# Altium PCB JaidonHillBootcamp.PcbDoc
Units mil, origin at the board's own origin, x right, y up, seen from the top; angles counter-clockwise.
Board outline 1150 x 1400 mil, 2 copper layers (Top Layer, Bottom Layer); 7 components, 4 nets, 15 pads, 3 vias.
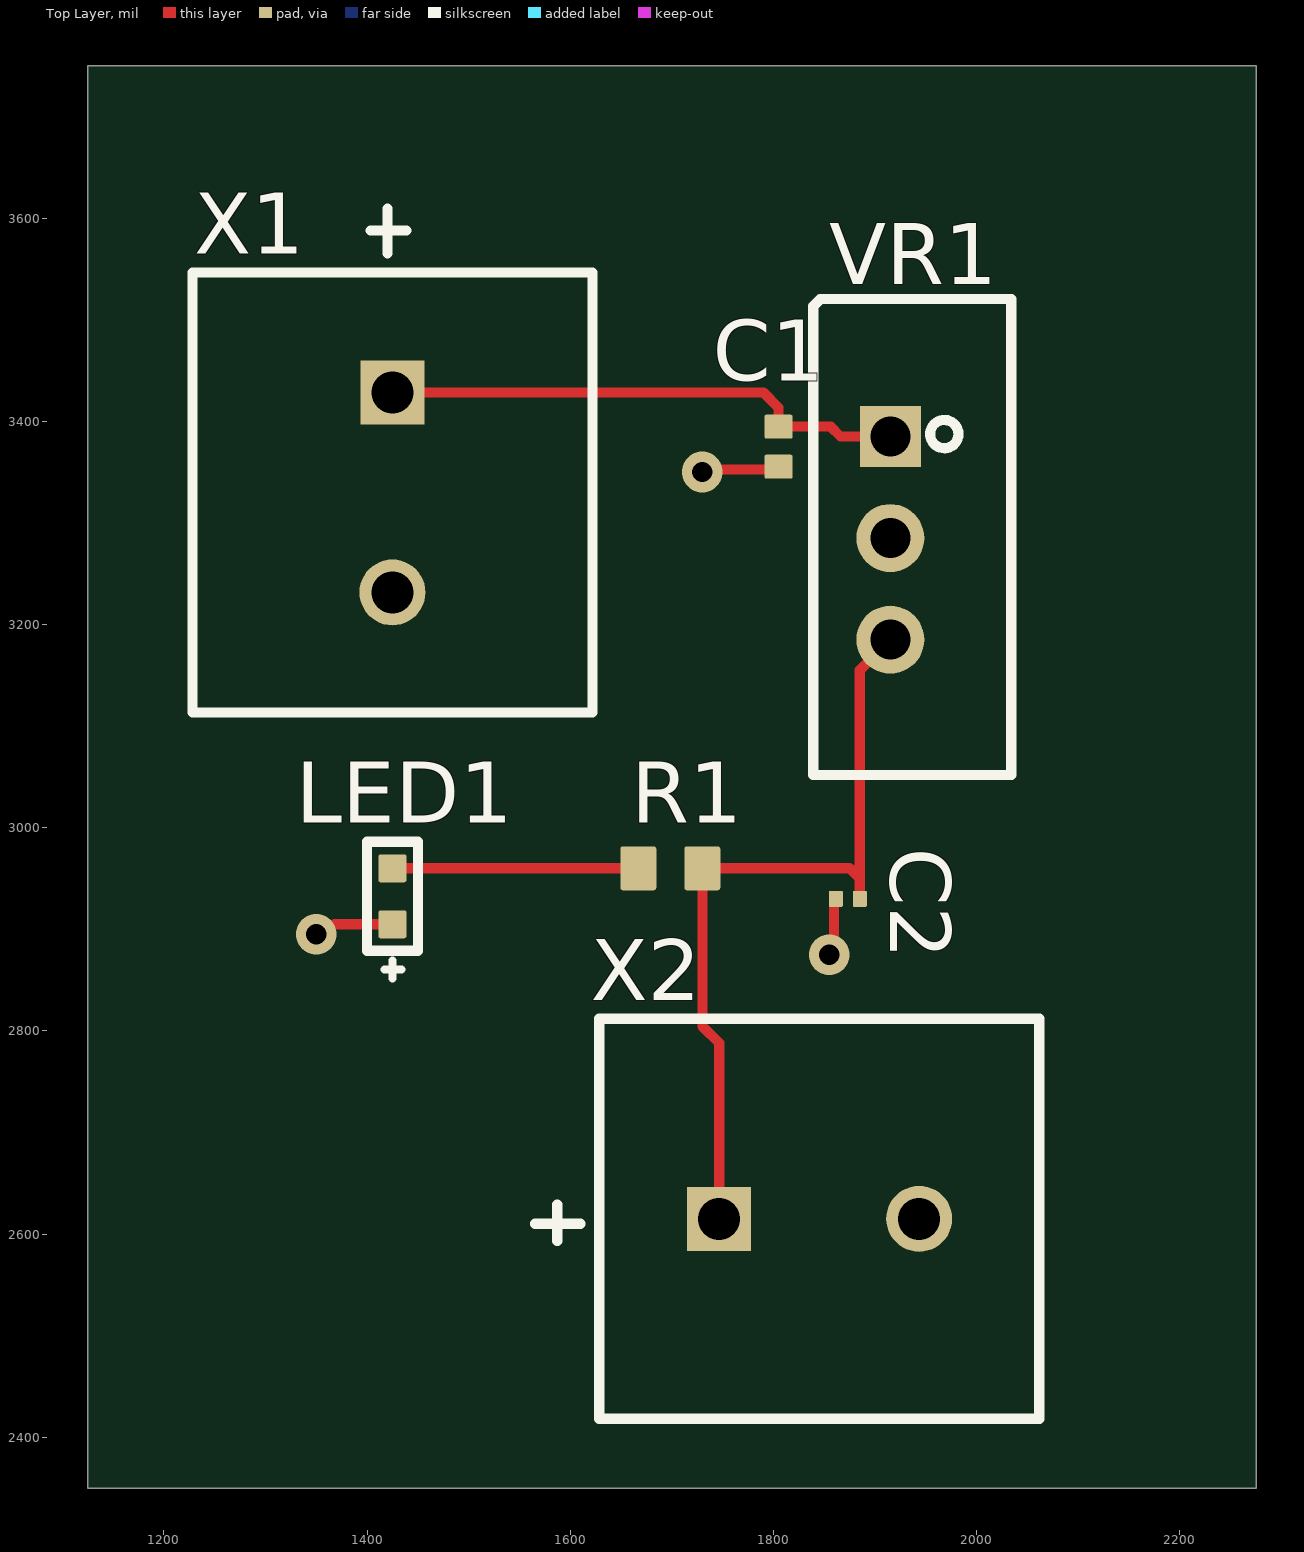
[diagram p0: Top Layer view]
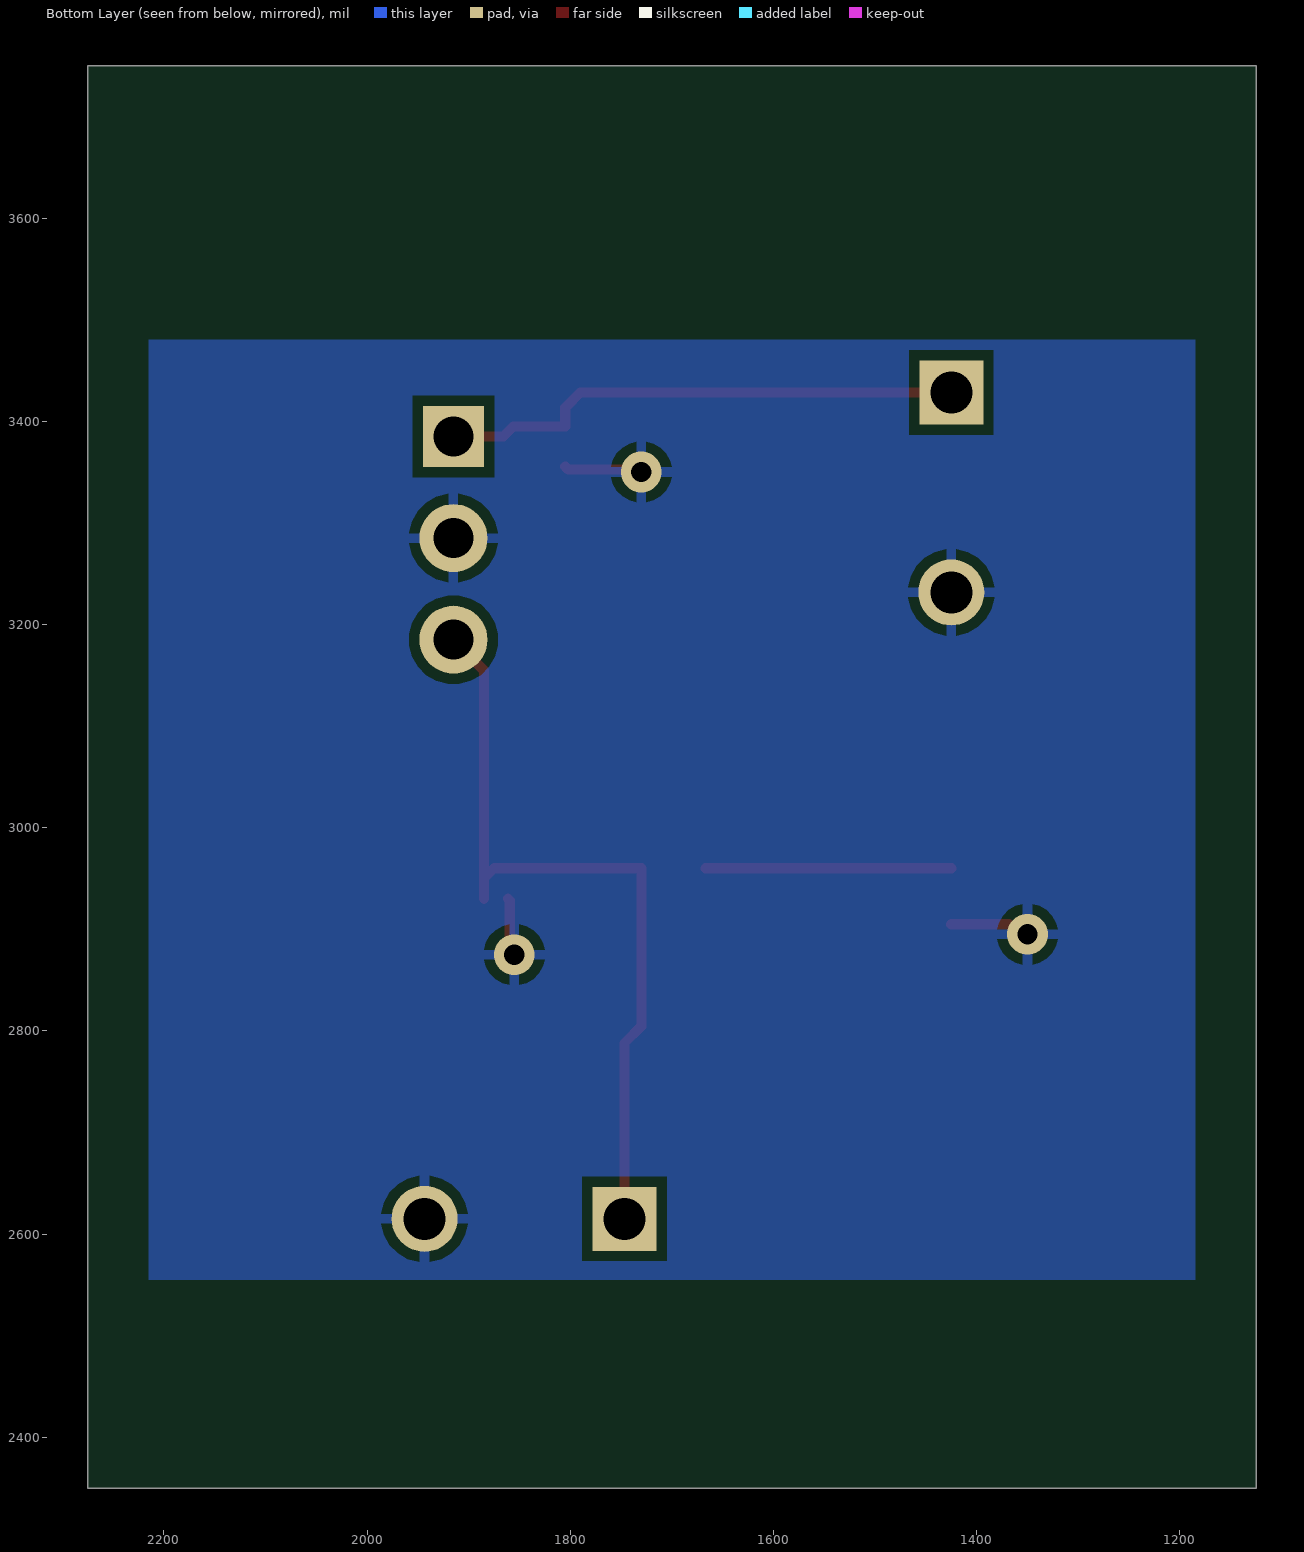
[diagram p1: Bottom Layer view, seen from below]
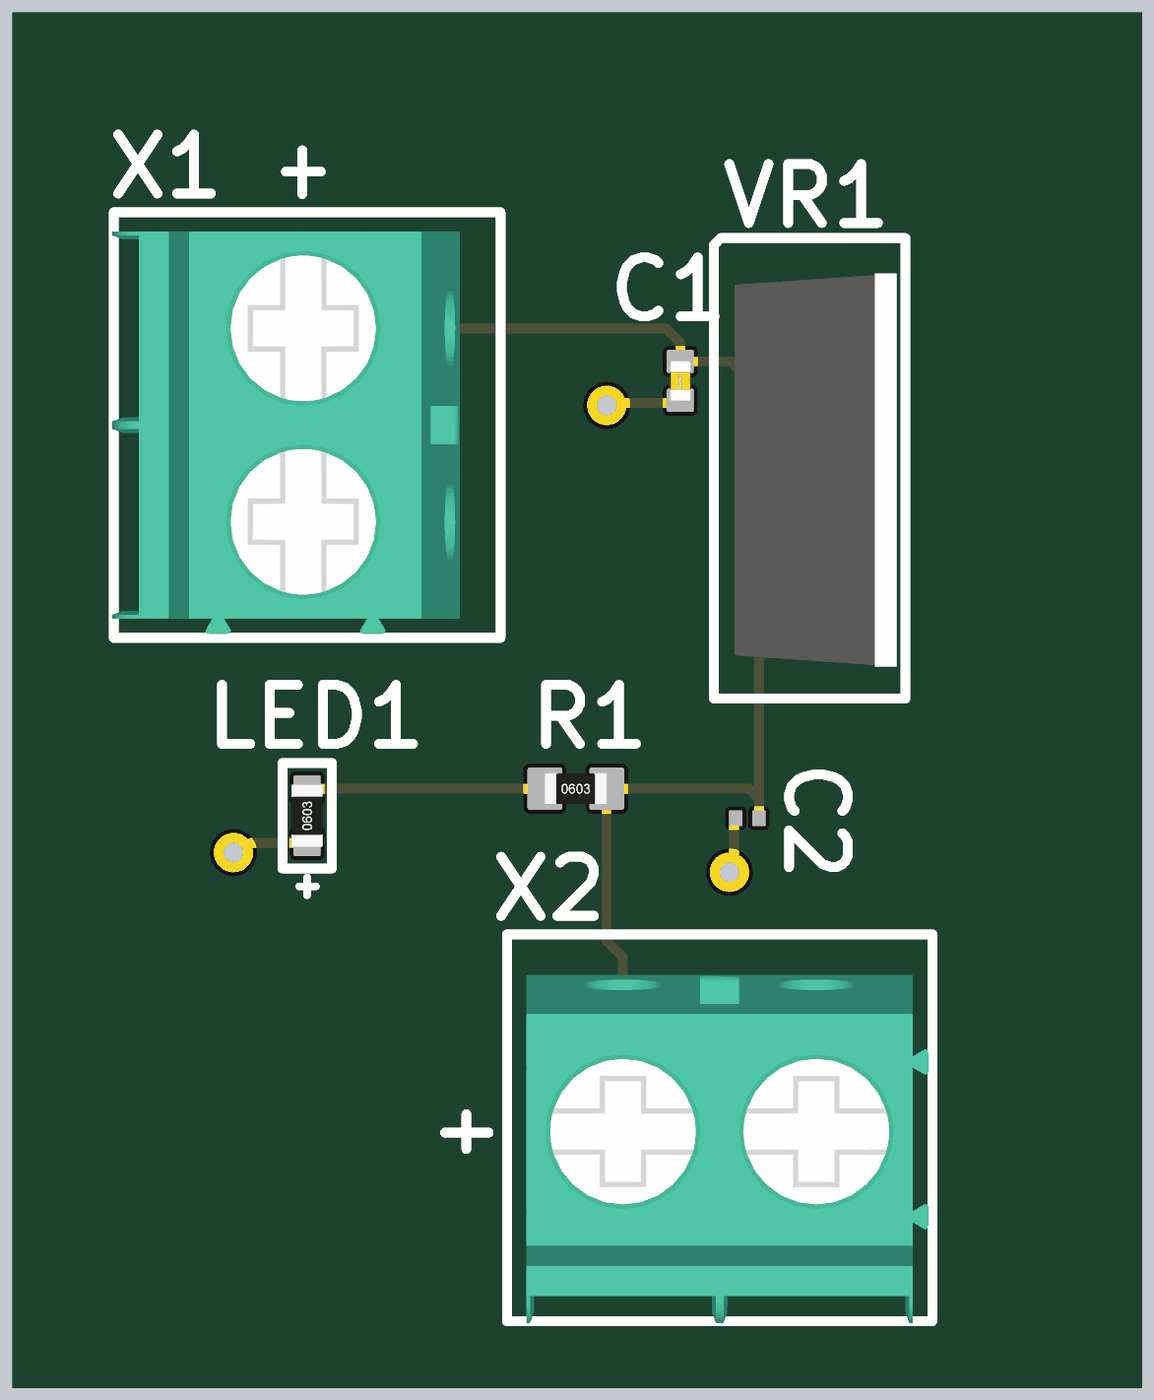
[diagram p2: 3D render of the assembled board from above, using the file's embedded part models]

## Layer stack, top to bottom
Top Solder: solder mask 0.4, Solder Resist, Dk 3.5
Top Layer: signal copper 1.4
Dielectric 1: dielectric 12.6, FR-4, Dk 4.8
Bottom Layer: signal copper 1.4
Bottom Solder: solder mask 0.4, Solder Resist, Dk 3.5

## Board outline
1125,2350 2275,2350 2275,3750 1125,3750

## Design rules (kind name [scope] priority, off if disabled: settings)
Clearance [All] p1: gap=10 ignorepadtopadclearanceinfootprint=FALSE except(0: Arc-Hole Track-Hole SMDPad-Hole THPad-Hole Via-Hole Fill-Hole Poly-Hole Region-Hole Text-Hole)
PolygonConnect [All] p1: connectstyle=Relief reliefconductorwidth=10 reliefentries=4 polygonreliefangle="90 Angle" airgapwidth=10
RoomDefinition JaidonHillBootcamp [InComponentClass('JaidonHillBootcamp')] p1: confinementstyle=ConfineIn formatcopy=TRUE lockcomponents=FALSE outline 2960,2973.27 3368.5,2973.27 3368.5,3085 2960,3085
RoutingVias [All] p1: holewidth=28 width=50 viastyle="Through Hole" minholewidth=28 minwidth=50 maxholewidth=28 maxwidth=50
SolderMaskExpansion [All] p1: expansion=4 istentingtop=FALSE
Width [All] p1: maxlimit=10 minlimit=10 preferedwidth=10
30 further rules are at their usual default settings.

## Components (designator, comment, footprint, x,y, rotation, side; value= is the part's Value field where it differs from the comment)
C1 "CGA2B1X7R1V224K050BC" CAP0402 1805,3375 r90 top value=0.22μF
C2 "CL03A104KQ3NNNC" CAP0201 1873.19,2930 r0 top value=0.1μF
LED1 "LTST-S270GKT" LTST-S270GKT 1425,2932.44 r90 top
R1 "RC0603FR-07150RL" RES0603 1698.5,2960 r0 top value=150Ω
VR1 "LM7805CT" TO-220-3 1915,3285 r270 top
X1 "1934861" 1934861 1425,3330 r270 top
X2 "1934861" 1934861 1845,2615 r0 top

## Footprints (in the part's own frame and the unit in brackets; to place one, negate y for a bottom-side part, rotate by r counter-clockwise, add the part's x,y. Pads: shape width x height; smd on the part's side, far side on the other; paste and mask are expansions set on the pad)
1934861 [mm]
  rect 1.6x1.6 hole 1.05 mask+0.05: 1(-2.5,0)
  round 1.65 hole 1.05 mask+0.05: 2(2.5,0)
  silkscreen extent -7.1,-5 5.5,5, body extent -5,-5.05 5.4,3.95, height 11.41
CAP0201 [mm] "Chip Capacitor, Body 0.6x0.3mm, Height 0.25mm, IPC Medium Density"
  rrect15% 0.35x0.4 smd: 1(-0.3,0) 2(0.3,0)
  body extent -0.3,-0.15 0.3,0.15, height 0.3
CAP0402 [mm] "Chip Capacitor, Body 1x0.5mm, Height 0.35mm, IPC Medium Density"
  rrect15% 0.6x0.7 smd: 1(-0.5,0) 2(0.5,0)
  body extent -0.53,-0.28 0.52,0.27, height 0.54
LTST-S270GKT [mm] "SMD LED 0603"
  rrect15% 0.7x0.7 smd: 1(-0.7,0) 2(0.7,0)
  silkscreen extent -2.05,-0.64 1.36,0.64, body extent -0.8,-0.4 0.8,0.4, height 0.46
RES0603 [mm] "Chip Resistor, Body 1.6x0.8mm, IPC Medium Density"
  rrect15% 0.9x1.1 smd: 1(-0.8,0) 2(0.8,0)
  body extent -0.8,-0.4 0.8,0.4, height 0.46
TO-220-3 [mm]
  rect 1.524x1.524 hole 1 mask+0.05: 1(-2.54,0)
  round 1.7 hole 1 mask+0.05: 2(0,0) 3(2.54,0)
  silkscreen extent -5.97,-1.93 5.93,3.02, body extent -5.06,-1.4 5.1,2.8, height 22.86

## Part data
C1: "CAP CER 0.22UF 35V X7R 0402", Manufacturer 1="TDK Corporation", Supplier Part Number 1=445-174422-2-ND, Voltage Rating=35V, Manufacturer Part Number 1=CGA2B1X7R1V224K050BC, Supplier 1=Digi-Key
C2: "CAP CER 0.1UF 6.3V X5R 0201", Manufacturer 1="Samsung Electro-Mechanics", Supplier Part Number 1=1276-1013-2-ND, Voltage Rating=6.3V, Manufacturer Part Number 1=CL03A104KQ3NNNC, Supplier 1=Digi-Key
LED1: "LED GREEN CLEAR SMD R/A", Manufacturer 1="Lite-On Inc.", Supplier Part Number 1=160-1475-2-ND, Manufacturer Part Number 1=LTST-S270GKT, Supplier 1=Digikey
R1: "RES 150 OHM 1% 1/10W 0603", Manufacturer 1=Yageo, Power Rating=1/10W, Supplier Part Number 1=311-150HRTR-ND, Manufacturer Part Number 1=RC0603FR-07150RL, Supplier 1=Digi-Key
VR1: "Linear Voltage Regulators 1.5-A, 35-V, linear voltage regulator 3-TO-220 0 to 125", Manufacturer 1="Texas Instruments", Supplier Part Number 1=926-LM7805CT, Manufacturer Part Number 1=LM7805CT, Supplier 1=Mouser

## Via types
v1: diameter 40, hole 20, Top Layer to Bottom Layer, 3 vias

## Nets (pads, with @x,y where several pads share a name; then routed paths per layer and width w, separated by ;. In a path a pad name is that pad's centre, name@x,y a point inside that pad or via, vN(x,y) a via of type N, cw(c..) or ccw(c..) an arc to the next point about the centre after c; other vN are vias at no path point)
+5: C2.2 R1.2 VR1.3 X2.1 | length 778.4
  Top Layer w10: X2.1 1746.57,2788 1730,2804.57 R1.2 1875,2960 1885,2950 ; C2.2 1885,2950 ; VR1.3 1885,3155 1885,2950
GND: C1.1 C2.1 LED1.1 VR1.2 X1.2 X2.2 | length 213.9
  Top Layer w10: v1(1350,2895) 1358.12,2895 1368,2904.88 LED1.1 ; v1(1730,3350) 1732.66,3352.66 1802.34,3352.66 C1.1 ; v1(1855,2875) 1859.49,2879.49 1859.49,2928.11 C2.1
INPUT: C1.2 VR1.1 X1.1 | length 519
  Top Layer w10: X1.1 1790,3428.43 1805,3413.43 C1.2 1856.31,3394.69 1866,3385 VR1.1
NetLED1_2: LED1.2 R1.1 | length 242
  Top Layer w10: LED1.2 R1.1

## Polygon pours and split planes (outlines as drawn)
GND on Bottom Layer "GND_L02_P000" (solid, pour order 0): 1215,3480 1185,3480 1185,2555 2200,2555 2215,2555 2215,3480

## Silkscreen, mask and mechanical layers (free items; w line width, h text height)
Mechanical 1:
  the board outline again, w10